# Allegro board METO_STM_CRY_V0_30.brd
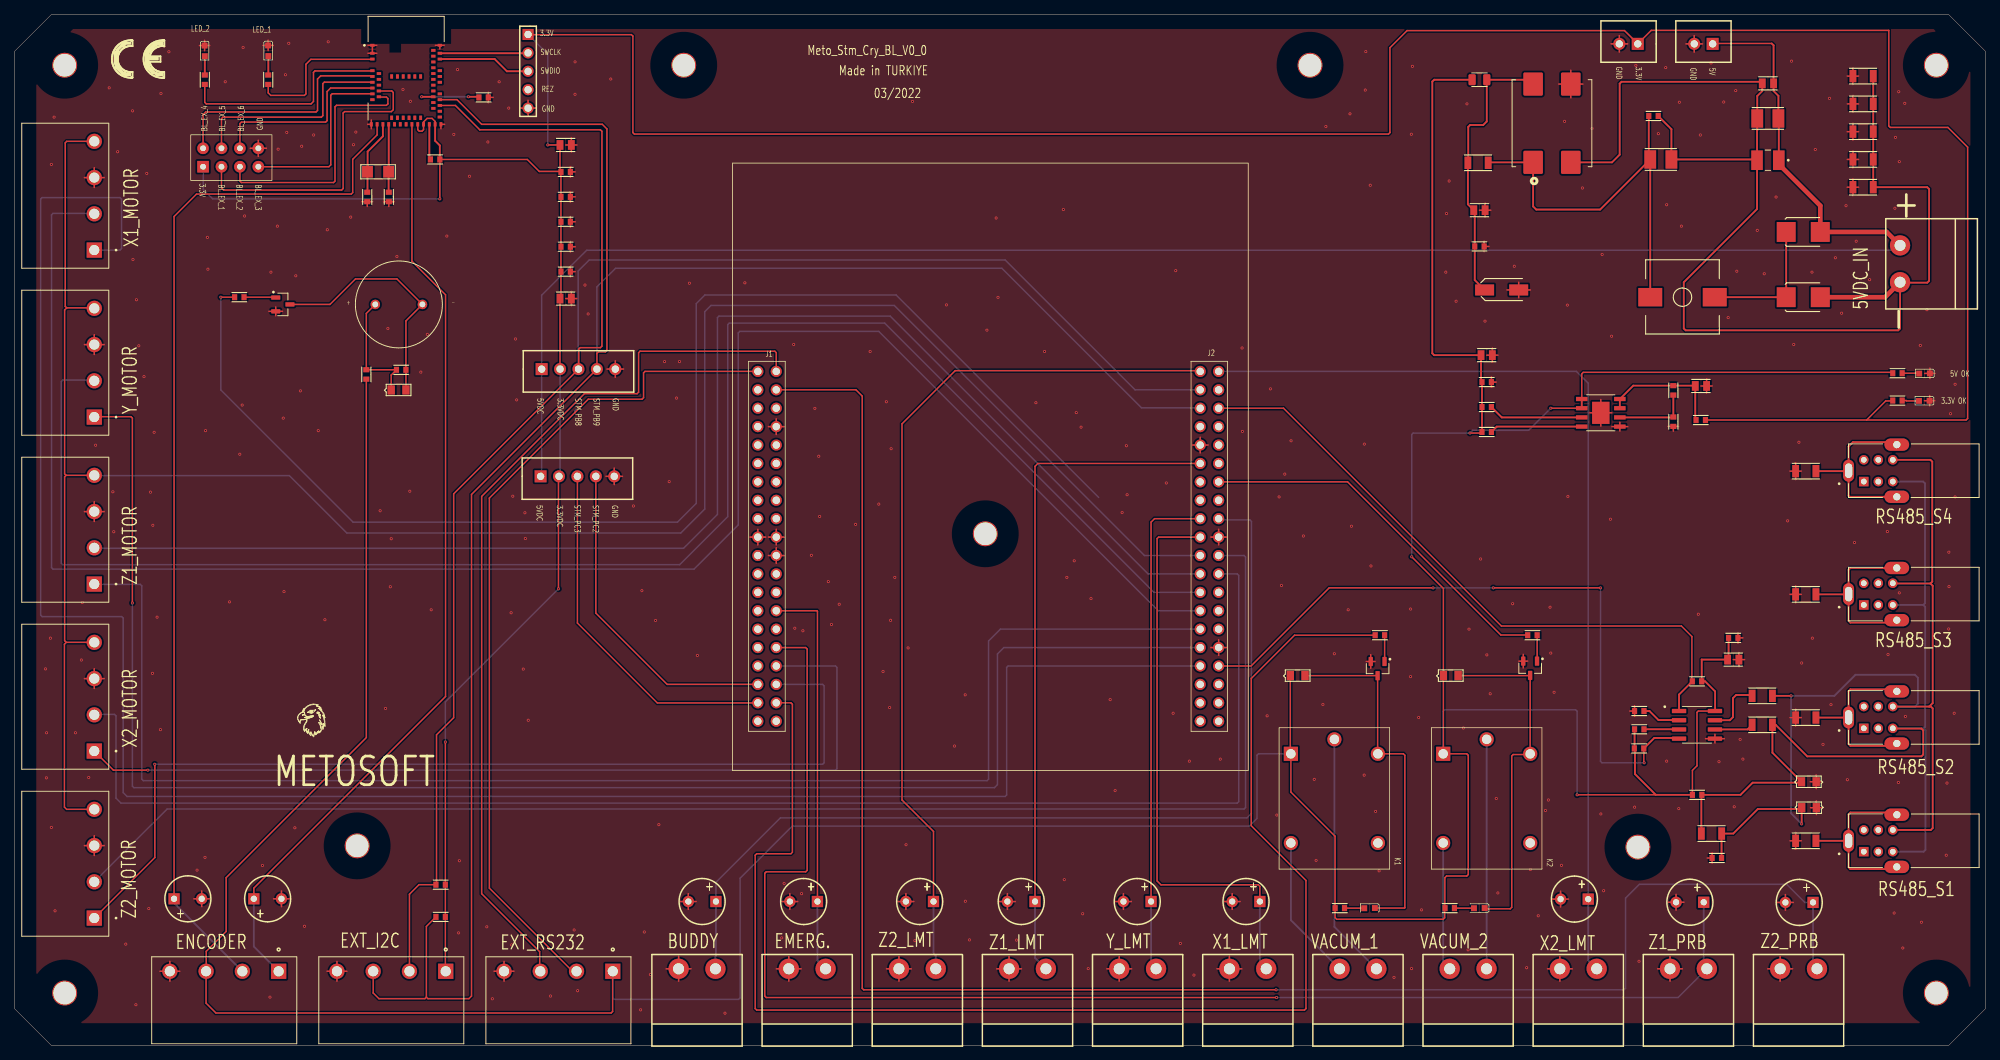
[diagram p0: board, top side]
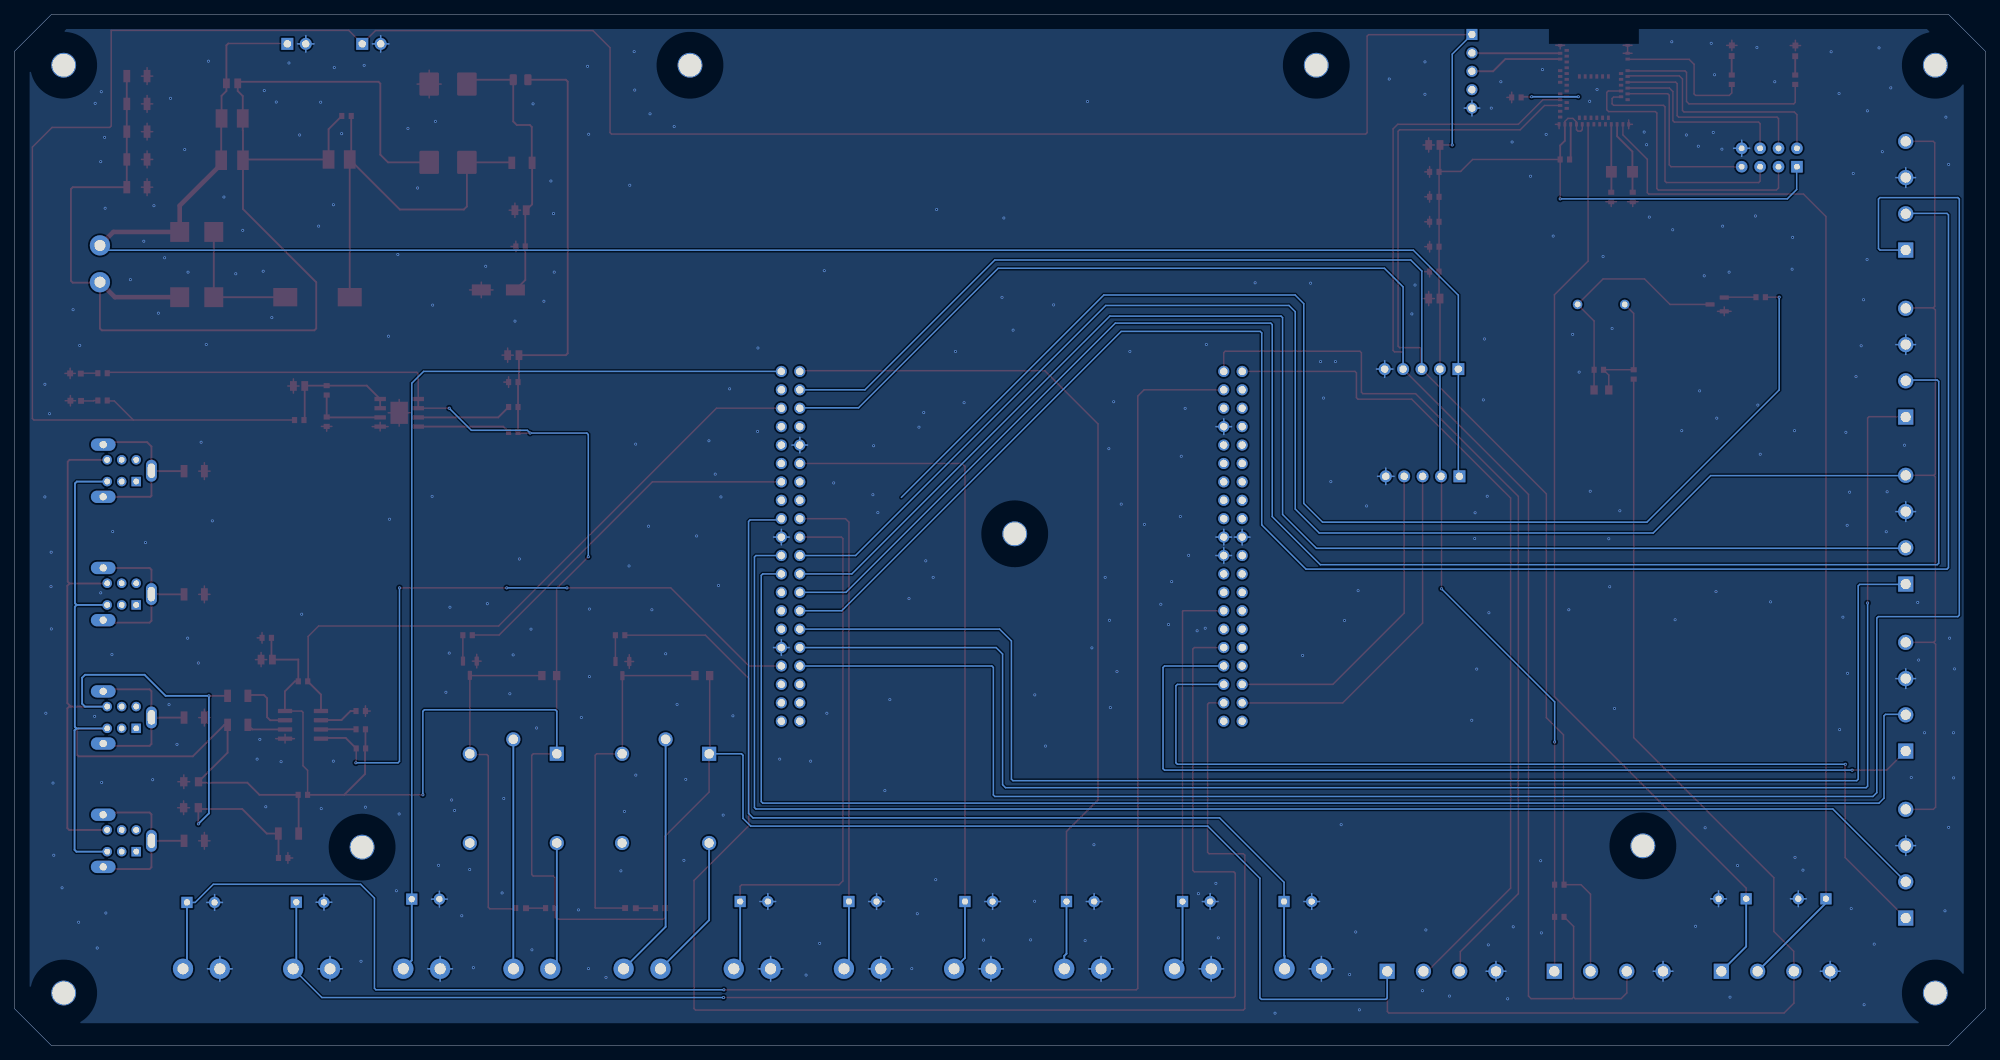
[diagram p1: board, bottom side, seen from below]

Outline 271.78 x 142.24 mm; copper layers: TOP, BOTTOM. Coordinates in mm from the lower left corner of the outline.
Outline path: 0,137.16 0,5.08 5.08,0 266.7,0 271.78,5.08 271.78,137.16 266.7,142.24 5.08,142.24 0,137.16

## Design rules (mm)
constraint set DEFAULT: min track width 0.203

## Placement (name value [footprint] x y rotation side)
C1  CAP POL  [CAPPOL2D250LS150034]  171.72 19.87 180 top
C2  CAP POL  [CAPPOL2D250LS150034]  217 20.2 180 top
C3  CAP POL  [CAPPOL2D250LS150034]  156.72 19.87 180 top
C4  CAP POL  [CAPPOL2D250LS150034]  140.72 19.87 180 top
C5  CAP POL  [CAPPOL2D250LS150034]  126.72 19.87 180 top
C6  CAP POL  [CAPPOL2D250LS150034]  110.72 19.87 180 top
C7  CAP POL  [CAPPOL2D250LS150034]  33 20.24 0 top
C8  CAP POL  [CAPPOL2D250LS150034]  96.72 19.87 180 top
C9  CAP POL  [CAPPOL2D250LS150034]  22 20.24 0 top
C10  CAP POL  [CAPPOL2D250LS150034]  232.92 19.76 180 top
C11  CAP POL  [CAPPOL2D250LS150034]  248 19.74 180 top
C12  10u/6V3/CER  [SMC0805]  237 53.24 0 top
C13  100n  [SMC0603]  237 56.24 0 top
C14  10u/6V3/CER  [SMC0805]  76 124.24 0 top
C15  100n  [SMC0603]  76 120.53 0 top
C16  100n  [SMC0603]  76 117.08 0 top
C17  100n  [SMC0603]  76 113.64 0 top
C18  100n  [SMC0603]  76 110.2 0 top
C19  100n  [SMC0603]  76 106.76 0 top
C20  10u/6V3/CER  [SMC0805]  76 103.05 0 top
C21  100n  [SMC0603]  64.68 130.8 0 top
C22  18p  [SMC0603]  48.64 117.07 90 top
C23  18p  [SMC0603]  51.61 117.07 90 top
C24  100n  [SMC0603]  202 110.24 0 top
C25  22uF/25V/LowESL  [SMC1210]  227 122.24 0 top
C26  100n  [SMC0603]  226 128.24 0 top
C27  10u/6V3/CER  [SMC0805]  202 115.24 0 top
C28  10u/6V3/CER  [SMC0805]  203 95.24 0 top
C29  100n  [SMC0603]  203 91.53 0 top
C30  10u/6V3/CER  [SMC0805]  232.54 90.99 0 top
C31  22uF/25VDV/Tantal  [CAP_6TPB33M]  241.78 122.14 180 top
C32  22uF/25V/LowESL  [SMC1210]  241.78 127.9 180 top
C33  10u/25V/CER  [SMC0805]  241.78 132.74 180 top
D1  1N4148WX  [SMDSOD323SD05T]  177.95 51.03 0 top
D2  1N4148WX  [SMDSOD323SD05T]  199.06 51.03 0 top
D3  SD12C  [SMDSOD323PESD5V]  248.44 36.39 0 top
D4  SD12C  [SMDSOD323PESD5V]  246.43 32.81 180 top
D5  1N4148WX  [SMDSOD323SD05T]  53.98 90.44 0 top
D6  LED-BLUE  [LED_0603]  35 137.24 90 top
D7  LED-RED  [LED_0603]  26.24 137.23 90 top
D8  MBRA340T3  [SMDO214AA21]  249 112.24 0 top
D9  MBRA340T3  [SMDO214AA21]  249 103.24 0 top
D10  SMAJ7A  [SMDO214AA21SMAJ33A]  205 104.24 0 top
D11  LED-GREEN  [LED_0603]  263.34 88.93 0 top
D12  LED-BLUE  [LED_0603]  186.85 18.94 0 top
D13  LED-BLUE  [LED_0603]  201.99 18.94 0 top
D14  LED-GREEN  [LED_0603]  263.37 92.7 0 top
F1  0ZCK0100FF2E  [FUSC2113X180N]  202 133.24 180 top
FB1  MPZ1608S601A  [SMR0603]  232.52 86.29 0 top
FL1  ACM1211-102-2PL-TL01  [FIL_ACM1211-102-2PL-TL01]  212 127.24 90 top
J1  FH_2x20SG  [FH2X20SG]  102.5 93 270 top
J2  FH_2x20SG  [FH2X20SG]  163.5 93 270 top
J3  CON2  [2LI_KLEMENS_200MILS]  155.46 10.58 180 top
J4  CON2  [2LI_KLEMENS_200MILS]  170.64 10.58 180 top
J5  282811-4  [TE_282811-4]  11 117.24 90 top
J6  CON2  [2LI_KLEMENS_200MILS]  185.83 10.58 180 top
J7  CON2  [2LI_KLEMENS_200MILS]  201.02 10.58 180 top
J8  282811-4  [TE_282811-4]  11 94.2 90 top
J9  CON2  [2LI_KLEMENS_200MILS]  140.27 10.58 180 top
J10  282811-4  [TE_282811-4]  11 71.16 90 top
J11  282811-4  [TE_282811-4]  51.96 10.24 180 top
J12  CON2  [2LI_KLEMENS_200MILS]  125.08 10.58 180 top
J13  282811-4  [TE_282811-4]  11 48.12 90 top
J14  282811-4  [TE_282811-4]  75 10.24 180 top
J15  CON2  [2LI_KLEMENS_200MILS]  109.89 10.58 180 top
J16  282811-4  [TE_282811-4]  11 25.08 90 top
J17  CON2  [2LI_KLEMENS_200MILS]  94.7 10.58 180 top
J18  CON2  [2LI_KLEMENS_200MILS]  79.51 10.58 180 top
J19  CON2  [2LI_KLEMENS_200MILS]  260 93.24 270 top
J20  282811-4  [TE_282811-4]  28.92 10.24 180 top
J21  CON2  [2LI_KLEMENS_200MILS]  216.21 10.58 180 top
J22  CON2  [2LI_KLEMENS_200MILS]  231.4 10.58 180 top
J23  5787956-1  [TE_5787956-1]  257 79.3 0 top
J24  CON5  [CON5X140PROG]  70.82 139.49 270 top
J25  5787956-1  [TE_5787956-1]  257 62.28 0 top
J26  5787956-1  [TE_5787956-1]  257 45.26 0 top
J27  5787956-1  [TE_5787956-1]  257 28.24 0 top
J28  CON8  [HEADER_2_54MM_2X4]  26 121.24 0 top
J29  CON5  [CON5X140]  72.69 93.32 0 top
J30  CON5  [CON5X140]  72.54 78.52 0 top
J31  CON2  [CON2X140]  234.16 138.19 180 top
J32  CON2  [CON2X140]  223.83 138.19 180 top
K1  JQC-3F-_T73_-1Z-12VDC  [JQC3FT731Z12VDC]  176 40.24 270 top
K2  JQC-3F-_T73_-1Z-12VDC  [JQC3FT731Z12VDC]  197 40.24 270 top
L1  10uH  [SML0603]  58 122.24 0 top
L2  10u/SLF10145  [SLF10145NEW]  230 103.24 0 top
LS1  CCG-1206  [CUI_CCG-1206]  53 102.24 0 top
NOREF  -  []  188 40.24 90 top
NOREF#2  -  []  176 40.24 0 top
NOREF#3  -  []  176 27.94 0 top
NOREF#4  -  [unnamed#2]  6.92 135.24 0 top
NOREF#5  -  []  176 40.24 90 top
NOREF#6  -  []  197 40.24 0 top
NOREF#7  -  [unnamed#2]  178.64 135.24 0 top
NOREF#8  -  []  39.01 42.58 0 top
NOREF#9  -  [unnamed#2]  92.28 135.24 0 top
NOREF#10  -  []  209 40.24 90 top
NOREF#11  -  [unnamed#2]  47.25 27.54 0 top
NOREF#12  -  [unnamed#2]  223.85 27.37 0 top
NOREF#13  -  []  209 27.94 90 top
NOREF#14  -  [unnamed#2]  133.86 70.6 0 top
NOREF#15  -  []  197 27.94 0 top
NOREF#16  -  []  197 40.24 90 top
NOREF#17  -  [unnamed#2]  265 135.24 0 top
NOREF#18  -  [unnamed#2]  6.92 7.24 0 top
NOREF#19  -  []  188 27.94 90 top
NOREF#20  -  [unnamed#2]  265 7.24 0 top
NOREF#21  -  []  102.5 44.74 0 top
Q1  BC817  [SOT95P230X110-3N]  187.96 52 270 top
Q2  BC817  [SOT95P230X110-3N]  208.99 52.05 270 top
Q3  BC817  [SOT95P230X110-3N]  37 102.24 0 top
R1  1K  [SMR0603]  188.28 56.61 0 top
R2  1K  [SMR0603]  209.31 56.61 0 top
R3  10k  [SMR0603]  232.02 34.58 0 top
R4  10k  [SMR0603]  224.01 40.98 0 top
R5  10k  [SMR0603]  224.04 43.63 0 top
R6  10k  [SMR0603]  232 50.24 180 top
R7  10k  [SMR0603]  224.04 46.14 0 top
R8  100R  [SMR1206]  241 44.24 180 top
R9  120R  [SMR1206]  234 29.24 0 top
R10  100R  [SMR1206]  241 48.24 180 top
R11  100R  [SMR1206]  247 79.24 0 top
R12  10k  [SMR0603]  234.73 25.87 180 top
R13  33R  [SMR0603]  48.51 92.58 270 top
R14  1K  [SMR0603]  53.32 93.22 180 top
R15  180R  [SMR0603]  31 103.24 0 top
R16  470R  [SMR0603]  34.99 133.24 90 top
R17  470R  [SMR0603]  26.24 133.24 90 top
R18  OR  [SMR1206]  201.81 121.78 180 top
R19  0R  [SMR1206]  254.9 118.41 180 top
R20  0R  [SMR1206]  254.9 122.24 180 top
R21  0R  [SMR1206]  254.9 126.08 180 top
R22  0R  [SMR1206]  254.9 129.91 180 top
R23  0R  [SMR1206]  254.9 133.74 180 top
R24  100k  [SMR0603]  203 88.08 0 top
R25  6k8  [SMR0603]  228.74 90.39 270 top
R26  100k  [SMR0603]  203 84.64 0 top
R27  470R  [SMR0603]  259.64 88.98 0 top
R28  2k2  [SMR0603]  228.74 86.06 270 top
R29  100R  [SMR1206]  247 62.24 0 top
R30  100R  [SMR1206]  247 45.24 0 top
R31  100R  [SMR1206]  247 28.24 0 top
R32  470R  [SMR0603]  182.75 18.95 0 top
R33  470R  [SMR0603]  197.9 18.95 0 top
R34  1K5  [SMR0603]  58.76 17.74 180 top
R35  1K5  [SMR0603]  58.76 22.19 180 top
R36  470R  [SMR0603]  259.64 92.75 0 top
U1  MAX485ESA+  [SOIC127P600X175-8N]  232 44.24 0 top
U2  MDBT50Q-1MV2  [XCVR_MDBT50Q-1MV2]  54 134.24 0 top
U3  AP7165-SPG-13  [SOIC127P600X163-9N]  218.74 87.29 0 top
UNK&COMP  -  []  12.78 130.7 0 top
Y1  CM315D32768DZFT  [XTAL_CM315_SMD]  50.13 120.54 180 top

## Library data of the parts
C1-C11 = CAP POL
C12-C23 C28-C30 = CAPACITOR NON-POL
C24-C27 = CAPACITOR NON-POL: room: Vdd5V
C31 = 6TPB33M: room: PowerIn
C32 C33 = CAPACITOR NON-POL: room: PowerIn
D1 D2 D5 = DIODE ZENER: room: Buzzer
D3 D4 = DIODE TVS BI-DIR: room: rs232
D6 D7 D11-D14 = LED
D8 = 1N5819M/CYL
D9 = 1N5819M/CYL: room: Vdd5V
D10 = DIODE TVS: room: Vdd5V
F1 = 0ZCK0100FF2E: room: usb2
FB1 = INDUCTOR/SM
FL1 = ACM1211-102-2PL-TL01: room: Vdd5V
J1 J2 = FH_2x20SG
J3 J4 J6 J7 J9 J12 J15 J17-J19 J21 J22 J31 J32 = CON2
J5 J8 J10 J11 J13 J14 J16 J20 = 282811-4
J23 J25-J27 = 5787956-1
J24 J29 J30 = CON5
J28 = CON8
K1 K2 = JQC-3F-_T73_2
L1 = INDUCTOR
L2 = INDUCTOR/SM: room: Vdd5V
LS1 = CCG-1206: room: Buzzer
Q1-Q3 = BC817: room: Buzzer
R1 R2 R11 R13-R15 R29-R31 = RESISTOR/SM_0: room: Buzzer
R3-R10 R12 R25 R28 = RESISTOR/SM_0
R16 R17 R24 R26 R27 R32-R36 = RESISTOR
R18 = RESISTOR/SM_0: room: Vdd5V
R19-R23 = RESISTOR: room: GndMatch
U1 = MAX485ESA+
U2 = MDBT50Q-1MV2_0
U3 = AP7165-SPG-13_0
Y1 = CRYSTAL/SM

## Footprints (pads in the part's own frame, mm; a bottom-side part is the same pattern mirrored in y, then rotated)
2LI_KLEMENS_200MILS
  round 2.794 hole 1.524: 1(-17.145,0) 2(-12.065,0)
CAP_6TPB33M
  rect 1.6x2.7 smd: 1(-1.5,0) 2(1.5,0)
CAPPOL2D250LS150034
  rect 1.549x1.549 hole 0.864: 1(0,0)
  round 1.549 hole 0.864: 2(3.81,0)
CON2X140
  rect 1.651x1.651 hole 1.016: 1(0,0)
  round 1.651 hole 1.016: 2(2.54,0)
CON5X140
  rect 1.651x1.651 hole 1.016: 1(0,0)
  round 1.651 hole 1.016: 2(2.54,0) 3(5.08,0) 4(7.62,0) 5(10.16,0)
CON5X140PROG
  rect 1.524x1.524 hole 1.016: 1(0,0)
  round 1.524 hole 1.016: 2(2.54,0) 3(5.08,0) 4(7.62,0) 5(10.16,0)
CUI_CCG-1206
  round 1.308 hole 0.8: M(3.25,0) P(-3.25,0)
FH2X20SG
  round 1.53 hole 1.02: 1(0,0) 2(0,2.54) 3(2.54,0) 4(2.54,2.54) 5(5.08,0) 6(5.08,2.54) 7(7.62,0) 8(7.62,2.54) 9(10.16,0) 10(10.16,2.54) 11(12.7,0) 12(12.7,2.54) 13(15.24,0) 14(15.24,2.54) 15(17.78,0) 16(17.78,2.54) 17(20.32,0) 18(20.32,2.54) 19(22.86,0) 20(22.86,2.54) 21(25.4,0) 22(25.4,2.54) 23(27.94,0) 24(27.94,2.54) 25(30.48,0) 26(30.48,2.54) 27(33.02,0) 28(33.02,2.54) 29(35.56,0) 30(35.56,2.54) 31(38.1,0) 32(38.1,2.54) 33(40.64,0) 34(40.64,2.54) 35(43.18,0) 36(43.18,2.54) 37(45.72,0) 38(45.72,2.54) 39(48.26,0) 40(48.26,2.54)
FIL_ACM1211-102-2PL-TL01
  custom 3.2x2.7 smd: 1(-5.4,2.6) 2(-5.4,-2.6) 3(5.4,-2.6) 4(5.4,2.6)
FUSC2113X180N
  custom 1x1.52 smd: 1(-1.01,0) 2(1.01,0)
HEADER_2_54MM_2X4
  rect 1.6x1.6 hole 0.8: 1(0,0)
  round 1.6 hole 0.8: 2(2.54,0) 3(5.08,0) 4(7.62,0) 5(0,2.54) 6(2.54,2.54) 7(5.08,2.54) 8(7.62,2.54)
JQC3FT731Z12VDC
  rect 1.95x1.95 hole 1.3: 1(0,0)
  round 1.95 hole 1.3: 2(12.3,0) 3(12.3,12) 4(0,12) 5(-2,6)
LED_0603
  rect 0.813x0.813 smd: 1(-0.737,0) 2(0.737,0.025)
SLF10145NEW
  rect 3.302x2.54 smd: 1(-4.445,0) 2(4.445,0)
SMC0603
  rect 0.711x0.838 smd: 1(-0.65,0) 2(0.65,0)
SMC0805
  rect 0.94x1.346 smd: 1(-0.78,0) 2(0.78,0)
SMC1210
  rect 1.626x2.54 smd: 1(-1.448,0) 2(1.473,0)
SMDO214AA21
  rect 2.616x2.743 smd: 1(0,0) 2(-4.699,0)
SMDO214AA21SMAJ33A
  rect 2.616x1.524 smd: 1(2.413,0) 2(-2.286,0)
SMDSOD323PESD5V
  rect 1.016x1.27 smd: 1(0,0) 2(-2.032,0)
SMDSOD323SD05T
  rect 1.016x1.27 smd: 1(0,0) 2(-2.032,0)
SML0603
  rect 0.711x0.838 smd: 1(-0.65,0) 2(0.65,0)
SMR0603
  rect 0.711x0.838 smd: 1(-0.65,0) 2(0.65,0)
SMR1206
  rect 0.94x1.702 smd: 1(-1.4,0) 2(1.4,0)
SOIC127P600X163-9N
  rect 1.58x0.59 smd: 1(-2.625,1.905) 2(-2.625,0.635) 3(-2.625,-0.635) 4(-2.625,-1.905) 5(2.625,-1.905) 6(2.625,-0.635) 7(2.625,0.635) 8(2.625,1.905)
  rect 2.41x3.05 smd: 9(0,0)
SOIC127P600X175-8N
  custom 1.97x0.59 smd: 1(-2.475,1.905) 2(-2.475,0.635) 3(-2.475,-0.635) 4(-2.475,-1.905) 5(2.475,-1.905) 6(2.475,-0.635) 7(2.475,0.635) 8(2.475,1.905)
SOT95P230X110-3N
  custom 1.26x0.59 smd: 1(-0.98,0.95) 2(-0.98,-0.95) 3(0.98,0)
TE_282811-4
  rect 2.1x2.1 hole 1.4: 1(-7.5,0)
  round 2.1 hole 1.4: 2(-2.5,0) 3(2.5,0) 4(7.5,0)
TE_5787956-1
  rect 1.308x1.308 hole 0.8: 1(-2,-1.5)
  round 1.308 hole 0.8: 2(-2,1.5) 3(0,-1.5) 4(0,1.5) 5(2,-1.5) 6(2,1.5)
  oval 1.508x3.016 hole 1x2: S1(-4.1,0)
  oval 3.4x1.7 hole 1: S2(2.55,3.6) S3(2.55,-3.6)
unnamed#2
  round 3.429 hole 3.124: (0,0)
XCVR_MDBT50Q-1MV2
  rect 0.6x0.4 smd: 1(-4.65,3.75) 2(-4.65,2.65) 3(-4.65,1.85) 4(-4.65,0.25) 5(-3.75,-0.15) 6(-4.65,-0.55) 7(-3.75,-0.95) 8(-4.65,-1.35) 9(-3.75,-1.75) 10(-4.65,-2.15) 11(-3.75,-2.55) 12(-4.65,-2.95) 13(-3.75,-3.35) 14(-4.65,-3.75) 34(4.65,-6.15) 35(4.65,-5.35) 36(3.75,-4.95) 37(4.65,-4.55) 38(3.75,-4.15) 39(4.65,-3.75) 40(3.75,-3.35) 41(4.65,-2.95) 42(3.75,-2.55) 43(3.75,-1.75) 44(4.65,-1.35) 45(3.75,-0.95) 46(4.65,-0.55) 47(3.75,-0.15) 48(4.65,0.25) 49(3.75,0.65) 50(3.75,1.45) 51(4.65,1.85) 52(3.75,2.25) 53(4.65,2.65) 54(3.75,3.05) 55(4.65,3.75)
  rect 0.4x0.6 smd: 15(-4.8,-7.15) 16(-4,-7.15) 17(-3.2,-7.15) 18(-2.4,-7.15) 19(-2,-6.25) 20(-1.6,-7.15) 21(-1.2,-6.25) 22(-0.8,-7.15) 23(-0.4,-6.25) 24(0,-7.15) 25(0.4,-6.25) 26(0.8,-7.15) 27(1.2,-6.25) 28(1.6,-7.15) 29(2,-6.25) 30(2.4,-7.15) 31(3.2,-7.15) 32(4,-7.15) 33(4.8,-7.15) 56(-2,-0.55) 57(-1.2,-0.55) 58(-0.4,-0.55) 59(0.4,-0.55) 60(1.2,-0.55) 61(2,-0.55)
XTAL_CM315_SMD
  rect 1.499x1.6 smd: 1(-1.453,0) 2(1.463,0)

## Nets
3.3V: C14.1 C15.1 C16.1 C17.1 C18.1 C19.1 C20.1 FB1.2 J11.1 J24.1 J28.1 J29.2 J30.2 J32.1 L1.2 R27.1 R34.1 R35.1 U2.28 U2.30(VDDH) U2.32
GND: C1.2 C2.2 C3.2 C4.2 C5.2 C6.2 C7.2 C8.2 C9.2 C10.2 C11.2 C12.2 C13.2 C14.2 C15.2 C16.2 C17.2 C18.2 C19.2 C20.2 C21.2 C22.1 C23.1 C24.2 C27.2 C28.2 C29.2 C30.2 D3.1 D4.2 D6.2(CATHODE) D7.2(CATHODE) D10.1 D11.2(CATHODE) D14.2(CATHODE) FL1.3 J1.8 J1.19 J1.20 J1.22 J2.9 J2.20 J2.32 J3.2 J5.3 J7.2 J8.3 J9.2 J10.3 J11.4 J12.2 J13.3 J14.4 J15.2 J16.3 J17.2 J18.2 J20.4 J21.2 J22.2 J24.5 J28.8 J29.5 J30.5 J31.2 J32.2 Q1.2(E) Q2.2(E) Q3.2(E) R7.1 R11.1 R12.2 R19.2 R20.2 R21.2 R22.2 R23.2 R28.2 R29.1 R30.1 R31.1 U1.5 U2.1 U2.2 U2.15 U2.33 U2.55 U3.5 U3.9
VDD5VIN: C12.1 C13.1 C28.1 C29.1 D1.2(CATHODE) D2.2(CATHODE) F1.2 J14.1 J20.3 K1.1 K2.1 R3.1 R4.1 R5.1 R6.1 R13.2 R24.1 R26.1 R32.1 R33.1 R36.1 U1.8(VCC) U3.1 U3.2
485_A: D3.2 J23.5 J25.5 J26.5 J27.5 R3.2 R8.1 R9.1
485_B: D4.1 J23.6 J25.6 J26.6 J27.6 R9.2 R10.1 R12.1
BL_EX_PIN_1: J28.2 U2.11
BL_EX_PIN_2: J28.3 U2.13
BL_EX_PIN_3: J28.4 U2.12
BL_EX_PIN_4: J28.5 U2.6
BL_EX_PIN_5: J28.6 U2.8
BL_EX_PIN_6: J28.7 U2.10
CON_A_PIN_1: J1.1 J14.2
CON_A_PIN_2: J1.2 J14.3
CON_A_PIN_3: J1.3
CON_A_PIN_4: C11.1 J1.4 J22.1
CON_A_PIN_5: J1.5
CON_A_PIN_6: J1.6
CON_A_PIN_7: J1.7
CON_A_PIN_9: J1.9
CON_A_PIN_10: J1.10
CON_A_PIN_11: J1.11
CON_A_PIN_12: J1.12
CON_A_PIN_13: J1.13
CON_A_PIN_14: J1.14
CON_A_PIN_15: J1.15
CON_A_PIN_16: J1.16
CON_A_PIN_17: J1.17
CON_A_PIN_18: J1.18
CON_A_PIN_21: J1.21
CON_A_PIN_23: J1.23
CON_A_PIN_24: J1.24
CON_A_PIN_25: J1.25
CON_A_PIN_26: J1.26
CON_A_PIN_27: J1.27
CON_A_PIN_28: C6.1 J1.28 J17.1
CON_A_PIN_29: J1.29
CON_A_PIN_30: J1.30
CON_A_PIN_31: J1.31
CON_A_PIN_32: C10.1 J1.32 J21.1
CON_A_PIN_33: J1.33
CON_A_PIN_34: J1.34 J13.1
CON_A_PIN_35: J1.35 J30.4
CON_A_PIN_36: J1.36 J16.1
CON_A_PIN_37: J1.37 J30.3
CON_A_PIN_38: J1.38 R1.1
CON_A_PIN_39: J1.39
CON_A_PIN_40: J1.40
CON_B_PIN_1: C5.1 J2.1 J15.1
CON_B_PIN_2: C2.1 J2.2 J7.1
CON_B_PIN_3: J2.3 J11.2 J29.3 R35.2 U2.37
CON_B_PIN_4: J2.4
CON_B_PIN_5: J2.5 J11.3 J29.4 R34.2 U2.39
CON_B_PIN_6: J2.6 R6.2 U1.1
CON_B_PIN_7: J2.7
CON_B_PIN_8: J2.8
CON_B_PIN_10: J2.10
CON_B_PIN_11: C4.1 J2.11 J12.1
CON_B_PIN_12: J2.12 R15.1
CON_B_PIN_13: J2.13
CON_B_PIN_14: J2.14 R2.1
CON_B_PIN_15: J2.15
CON_B_PIN_16: J2.16
CON_B_PIN_17: C3.1 J2.17 J9.1
CON_B_PIN_18: C8.1 J2.18 J18.1
CON_B_PIN_19: C1.1 J2.19 J3.1
CON_B_PIN_21: J2.21 J5.4 J8.4 J10.4 J13.4 J16.4
CON_B_PIN_22: J2.22 J16.2
CON_B_PIN_23: J2.23 J10.2
CON_B_PIN_24: J2.24 J13.2
CON_B_PIN_25: J2.25 J8.2
CON_B_PIN_26: J2.26
CON_B_PIN_27: J2.27 J5.2
CON_B_PIN_28: J2.28
CON_B_PIN_29: J2.29 J10.1
CON_B_PIN_30: J2.30
CON_B_PIN_31: J2.31 J8.1
CON_B_PIN_33: J2.33 J5.1
CON_B_PIN_34: J2.34 R4.2 U1.4
CON_B_PIN_35: J2.35
CON_B_PIN_36: J2.36
CON_B_PIN_37: J2.37
CON_B_PIN_38: J2.38
CON_B_PIN_39: J2.39
CON_B_PIN_40: J2.40
DBG_LED_1: R16.1 U2.3
DBG_LED_2: R17.1 U2.4
ENCODER_A: C7.1 J20.1 U2.26
ENCODER_B: C9.1 J20.2 U2.16
FGND: C25.2 C26.2 C31.2 C32.2 C33.2 D9.1 FL1.2 J19.2 R19.1 R20.1 R21.1 R22.1 R23.1
NRESET: C21.1 U2.40
RELAY1_1: J4.1 K1.5
RELAY1_2: J4.2 K1.2
RELAY2_1: J6.1 K2.5
RELAY2_2: J6.2 K2.2
SWCLK: J24.2 U2.53
SWDIO: J24.3 U2.51
UC_OSC_IN: C22.2 U2.17 Y1.2
UC_OSC_OUT: C23.2 U2.18 Y1.1
VDC_5V: C31.1 C32.1 C33.1 D8.1 J19.1 J29.1 J30.1 J31.1
N8883662: D5.1 LS1.M Q3.3 R14.1
N8883700: D5.2(CATHODE) LS1.P R13.1 R14.2
N9062725: L1.1 U2.31
N9076286: D8.2(CATHODE) D9.2(CATHODE) L2.2
N9076290: C25.1 C26.1 FL1.1 L2.1 R18.1
N9076304: C24.1 C27.1 D10.2(CATHODE) F1.1 FL1.4 R18.2
N9079599: C30.1 FB1.1 R25.1 U3.7 U3.8
N9079749: R24.2 U3.3(POK)
N9079753: R25.2 R28.1 U3.6
N9079813: R26.2 U3.4
N9092651: D1.1 D12.2(CATHODE) K1.4 Q1.3
N9092718: Q1.1 R1.2
N9093131: D2.1 D13.2(CATHODE) K2.4 Q2.3
N9093215: Q2.1 R2.2
N9096482: R7.2 U1.2
N9096486: R5.2 U1.3
N9096991: R8.2 U1.6
N9096995: R10.2 U1.7
N9098499: J23.S1 J23.S2 J23.S3(SHIELD__2) R11.2
N9104799: J25.S1 J25.S2 J25.S3(SHIELD__2) R29.2
N9105165: J26.S1 J26.S2 J26.S3(SHIELD__2) R30.2
N9105269: J27.S1 J27.S2 J27.S3(SHIELD__2) R31.2
N9107937: D12.1 R32.2
N9108044: D13.1 R33.2
N90510690: Q3.1 R15.2
N90714391: D6.1 R16.2
N90750741: D7.1 R17.2
N90797911: D11.1 R27.2
N91389651: D14.1 R36.2

Pads without a net: J23 1 2 3 4; J24 4; J25 1 2 3 4; J26 1 2 3 4; J27 1 2 3 4; K1 3; K2 3; U2 5 7 9 14 19 20 21 22 23 24 25 27 29 34 35 36 38 41 42 43 44 45 46 47 48 49 50 52 54 56 57 58 59 60 61

## Via types
v1: diameter 0.406, hole 0.203, TOP to BOTTOM, 340 vias

## Routing (per net, layer and track width the routed paths; a pad name or vN(x,y) marks a point on that pad's centre or on a via; arc(x,y) is an arc through that point)
3.3V: length 527.2
  TOP w0.203: 255.39,86.3 269.11,86.3 269.32,86.5 269.32,123.94 266.6,126.66 258.65,126.66 258.44,126.86 258.44,140.04 225.69,140.04 J32.1 222,140.02 192.02,140.02 189.66,137.66 189.66,125.95 189.46,125.74 85.47,125.74 85.27,125.95 85.27,139.26 85.06,139.46 70.84,139.46 J24.1 ; 255.39,86.3 233.18,86.3 FB1.2 233.23,86.22 ; 255.39,86.3 258.02,88.93 258.94,88.93 R27.1 ; J30.2 75.01,78.45 v1(75.01,63.01) ; 75.29,120.59 72.36,120.59 70.71,122.24 L1.2 v1(58.65,116.8) ; 75.29,120.59 75.22,120.66 C14.1 v1(73.53,124.24) ; 75.29,120.59 C15.1 C16.1 C17.1 C18.1 C19.1 75.35,103.18 C20.1 75.22,93.33 J29.2 ; v1(59.41,41.87) R35.1 R34.1 59.41,10.29 J11.1 ; U2.28 55.6,126.35 55.8,126.15 56.2,126.15 56.4,126.35 U2.30 56.4,127.41 56.9,127.9 57.58,127.9 58,127.49 U2.32
  TOP w0.254: L1.2 58.65,124.17 58,124.82 U2.32
  BOTTOM w0.203: J24.1 73.53,136.77 v1(73.53,124.24) ; J28.1 26.04,121.2 26.04,118.1 27.33,116.8 v1(58.65,116.8) ; J30.2 75.23,78.67 J29.2 ; v1(75.01,63.01) 59.41,47.41 v1(59.41,41.87)
GND: length 564.9
  TOP w0.203: 51.61,115.76 C23.1 ; C23.1 52.34,116.42 ; C23.1 50.89,116.42 ; C1.2 167.91,20.95 ; C1.2 167.91,18.79 ; C1.2 166.83,19.87 ; C1.2 168.99,19.87 ; C12.2 238.55,53.24 ; C12.2 237,53.24 ; C12.2 237.78,54.22 ; C12.2 237.78,52.26 ; 166.04,69.07 J2.20 ; J2.20 164.97,70.14 ; J2.20 167.11,70.14 ; J2.20 166.04,71.21 ; 58.8,126.49 U2.33 59.3,127.09 ; U3.5 222.46,85.38 ; U3.5 220.27,85.38 ; U3.5 221.36,85.98 ; U3.5 221.36,84.78 ; 34.26,137.98 D6.2 ; D6.2 34.97,138.69 ; D6.2 34.97,137.27 ; D6.2 35.69,137.98 ; 163.5,81.77 J2.9 ; J2.9 163.5,83.91 ; J2.9 162.43,82.84 ; J2.9 164.57,82.84 ; 11,72.31 J10.3 ; J10.3 9.65,73.66 ; J10.3 12.35,73.66 ; J10.3 11,75.01 ; R23.2 254.27,133.74 ; R23.2 253.5,132.58 ; R23.2 252.72,133.74 ; R23.2 253.5,134.9 ; 253.5,117.26 R19.2 ; R19.2 252.72,118.41 ; R19.2 254.27,118.41 ; R19.2 253.5,119.57 ; 11,95.35 J8.3 ; J8.3 11,98.05 ; J8.3 9.65,96.7 ; J8.3 12.35,96.7 ; 120.25,10.58 J15.2 ; J15.2 121.95,12.29 ; J15.2 123.65,10.58 ; J15.2 121.95,8.88 ; 35.09,101.29 Q3.2 ; Q3.2 36.02,100.69 ; Q3.2 36.95,101.29 ; Q3.2 36.02,101.89 ; 203.65,90.8 C29.2 ; C29.2 204.31,91.53 ; C29.2 203.65,92.25 ; 82.7,77.39 J30.5 ; J30.5 82.7,79.65 ; J30.5 83.83,78.52 ; J30.5 81.57,78.52 ; C30.2 234.1,90.99 ; C30.2 233.32,91.97 ; C30.2 233.32,90.01 ; C30.2 232.55,90.99 ; D11.2 264.79,88.96 ; D11.2 263.36,88.96 ; D11.2 264.07,89.67 ; D11.2 264.07,88.24 ; J24.5 70.82,130.39 ; J24.5 70.82,128.26 ; J24.5 71.88,129.33 ; J24.5 69.75,129.33 ; 135.44,10.58 J12.2 ; J12.2 137.14,8.88 ; J12.2 137.14,12.29 ; J12.2 138.84,10.58 ; C21.2 65.99,130.8 ; C21.2 65.33,131.52 ; C21.2 65.33,130.08 ; R20.2 253.5,123.4 ; R20.2 254.27,122.24 ; R20.2 252.72,122.24 ; R20.2 253.5,121.09 ; 228.03,19.76 C10.2 ; C10.2 229.11,20.84 ; C10.2 229.11,18.68 ; C10.2 230.19,19.76 ; J1.19 102.5,71.21 ; J1.19 102.5,69.07 ; J1.19 103.57,70.14 ; J1.19 101.43,70.14 ; R12.2 234.08,26.6 ; R12.2 233.42,25.87 ; R12.2 234.08,25.15 ; C17.2 76.65,114.37 ; C17.2 77.31,113.64 ; C17.2 76.65,112.92 ; 248.44,35.45 D3.1 ; D3.1 247.62,36.39 ; D3.1 248.44,37.33 ; D3.1 249.25,36.39 ; 205.8,104.24 D10.1 ; D10.1 209.03,104.24 ; D10.1 207.41,103.17 ; D10.1 207.41,105.31 ; 203.78,94.26 C28.2 ; C28.2 203,95.24 ; C28.2 203.78,96.22 ; C28.2 204.55,95.24 ; 234.47,41.74 U1.5 ; U1.5 234.47,42.94 ; U1.5 235.76,42.34 ; U1.5 233.18,42.34 ; 222.73,46.14 R7.1 ; R7.1 223.39,46.86 ; R7.1 223.39,45.42 ; 245.6,44.08 R30.1 ; R30.1 245.6,46.4 ; R30.1 246.37,45.24 ; R30.1 244.82,45.24 ; 202.78,114.26 C27.2 ; C27.2 202,115.24 ; C27.2 203.55,115.24 ; C27.2 202.78,116.22 ; 105.04,84.31 J1.8 ; J1.8 106.11,85.38 ; J1.8 105.04,86.45 ; J1.8 103.97,85.38 ; 264.11,92.01 D14.2 ; D14.2 264.11,93.44 ; D14.2 264.82,92.72 ; D14.2 263.4,92.72 ; C20.2 76.78,104.03 ; C20.2 76.78,102.07 ; C20.2 77.55,103.05 ; C20.2 76.01,103.05 ; J2.32 167.11,54.9 ; J2.32 166.04,55.97 ; J2.32 164.97,54.9 ; J2.32 166.04,53.83 ; J9.2 152.33,12.29 ; J9.2 152.33,8.88 ; J9.2 150.63,10.58 ; J9.2 154.03,10.58 ; J14.4 67.5,11.6 ; J14.4 67.5,8.89 ; J14.4 68.85,10.24 ; J14.4 66.14,10.24 ; 228.74,84.75 R28.2 ; R28.2 229.46,85.41 ; R28.2 228.01,85.41 ; FL1.3 216.25,132.64 ; FL1.3 212.94,132.64 ; FL1.3 214.6,130.74 ; FL1.3 214.6,134.54 ; C5.2 122.91,20.95 ; C5.2 123.99,19.87 ; C5.2 122.91,18.79 ; C5.2 121.83,19.87 ; J1.20 105.04,71.21 ; J1.20 106.11,70.14 ; J1.20 105.04,69.07 ; J1.20 103.97,70.14 ; R11.1 245.6,80.4 ; R11.1 246.37,79.24 ; R11.1 245.6,78.08 ; R11.1 244.82,79.24 ; 33.62,122.68 J28.8 ; J28.8 34.72,123.78 ; J28.8 32.52,123.78 ; J28.8 33.62,124.88 ; Q1.2 187.01,53.91 ; Q1.2 186.41,52.98 ; Q1.2 187.01,52.04 ; Q1.2 187.61,52.98 ; 9.65,27.58 J16.3 ; J16.3 11,26.23 ; J16.3 11,28.93 ; J16.3 12.35,27.58 ; 91.83,19.87 C8.2 ; C8.2 92.91,18.79 ; C8.2 92.91,20.95 ; C8.2 93.99,19.87 ; 252.72,129.91 R22.2 ; R22.2 253.5,128.75 ; R22.2 254.27,129.91 ; R22.2 253.5,131.06 ; 165.82,10.58 J3.2 ; J3.2 169.22,10.58 ; J3.2 167.52,8.88 ; J3.2 167.52,12.29 ; 21.42,8.89 J20.4 ; J20.4 22.77,10.24 ; J20.4 21.42,11.6 ; J20.4 20.07,10.24 ; 82.85,92.19 J29.5 ; J29.5 81.72,93.32 ; J29.5 82.85,94.45 ; J29.5 83.98,93.32 ; 49.35,137.49 U2.1 ; U2.1 48.75,137.99 ; U2.1 49.95,137.99 ; J11.4 44.46,11.6 ; J11.4 44.46,8.89 ; J11.4 45.81,10.24 ; J11.4 43.1,10.24 ; 76.78,123.26 C14.2 ; C14.2 76.78,125.22 ; C14.2 77.55,124.24 ; C14.2 76.01,124.24 ; 76.65,119.8 C15.2 ; C15.2 77.31,120.53 ; C15.2 76.65,121.25 ; 237.65,55.52 C13.2 ; C13.2 237.65,56.96 ; C13.2 238.31,56.24 ; 135.83,19.87 C4.2 ; C4.2 136.91,18.79 ; C4.2 137.99,19.87 ; C4.2 136.91,20.95 ; 213.09,8.88 J7.2 ; J7.2 214.79,10.58 ; J7.2 213.09,12.29 ; J7.2 211.39,10.58 ; 48.7,127.09 U2.15 ; U2.15 49.2,126.49 ; U2.15 49.2,127.69 ; 89.87,10.58 J18.2 ; J18.2 91.57,12.29 ; J18.2 91.57,8.88 ; J18.2 93.28,10.58 ; C19.2 77.31,106.76 ; C19.2 76.65,106.04 ; C19.2 76.65,107.49 ; 26.21,137.25 D7.2 ; D7.2 25.5,137.96 ; D7.2 26.21,138.67 ; D7.2 26.92,137.96 ; C9.2 25.81,21.32 ; C9.2 24.73,20.24 ; C9.2 26.89,20.24 ; C9.2 25.81,19.16 ; 221.29,137.06 J32.2 ; J32.2 222.42,138.19 ; J32.2 221.29,139.32 ; J32.2 220.16,138.19 ; 103.97,67.6 J1.22 ; J1.22 105.04,68.67 ; J1.22 105.04,66.53 ; J1.22 106.11,67.6 ; 152.91,18.79 C3.2 ; C3.2 153.99,19.87 ; C3.2 152.91,20.95 ; C3.2 151.83,19.87 ; 243.11,19.74 C11.2 ; C11.2 244.19,20.82 ; C11.2 244.19,18.66 ; C11.2 245.27,19.74 ; R31.1 245.6,29.4 ; R31.1 245.6,27.08 ; R31.1 244.82,28.24 ; R31.1 246.37,28.24 ; J5.3 11,121.09 ; J5.3 11,118.39 ; J5.3 9.65,119.74 ; J5.3 12.35,119.74 ; 207.44,53.03 Q2.2 ; Q2.2 208.64,53.03 ; Q2.2 208.04,52.09 ; Q2.2 208.04,53.96 ; 230.49,138.19 J31.2 ; J31.2 231.62,139.32 ; J31.2 231.62,137.06 ; J31.2 232.75,138.19 ; 9.65,50.62 J13.3 ; J13.3 12.35,50.62 ; J13.3 11,51.97 ; J13.3 11,49.27 ; R21.2 253.5,127.23 ; R21.2 253.5,124.92 ; R21.2 252.72,126.08 ; R21.2 254.27,126.08 ; U3.9 220.25,87.29 ; U3.9 218.74,89.12 ; U3.9 217.23,87.29 ; U3.9 218.74,85.46 ; 48.75,136.89 U2.2 ; U2.2 49.35,137.39 ; U2.2 49.95,136.89 ; C6.2 107.99,19.87 ; C6.2 106.91,18.79 ; C6.2 105.83,19.87 ; C6.2 106.91,20.95 ; C7.2 36.81,21.32 ; C7.2 37.89,20.24 ; C7.2 35.73,20.24 ; C7.2 36.81,19.16 ; 106.76,8.88 J17.2 ; J17.2 105.06,10.58 ; J17.2 106.76,12.29 ; J17.2 108.47,10.58 ; 202.65,109.52 C24.2 ; C24.2 203.31,110.24 ; C24.2 202.65,110.96 ; 243.47,8.88 J22.2 ; J22.2 241.76,10.58 ; J22.2 243.47,12.29 ; J22.2 245.17,10.58 ; 245.6,61.08 R29.1 ; R29.1 245.6,63.4 ; R29.1 244.82,62.24 ; R29.1 246.37,62.24 ; 213.19,19.12 C2.2 ; C2.2 214.27,20.2 ; C2.2 212.11,20.2 ; C2.2 213.19,21.28 ; J21.2 228.28,12.29 ; J21.2 228.28,8.88 ; J21.2 229.98,10.58 ; J21.2 226.58,10.58 ; 47.92,116.42 C22.1 ; C22.1 48.64,115.76 ; C22.1 49.36,116.42 ; D4.2 248.46,33.75 ; D4.2 249.28,32.81 ; D4.2 247.65,32.81 ; D4.2 248.46,31.87 ; C16.2 77.31,117.08 ; C16.2 76.65,116.36 ; C16.2 76.65,117.81 ; U2.55 59.25,137.99 ; U2.55 58.05,137.99 ; U2.55 58.65,137.49 ; C18.2 76.65,110.93 ; C18.2 77.31,110.2 ; C18.2 76.65,109.48
  BOTTOM w0.203: 92.91,18.79 C8.2 ; C8.2 93.99,19.87 ; C8.2 91.83,19.87 ; C8.2 92.91,20.95 ; 213.19,19.12 C2.2 ; C2.2 213.19,21.28 ; C2.2 212.11,20.2 ; C2.2 214.27,20.2 ; C7.2 37.89,20.24 ; C7.2 36.81,19.16 ; C7.2 36.81,21.32 ; C7.2 35.73,20.24 ; 24.73,20.24 C9.2 ; C9.2 25.81,19.16 ; C9.2 25.81,21.32 ; C9.2 26.89,20.24 ; J7.2 213.09,12.29 ; J7.2 214.79,10.58 ; J7.2 211.39,10.58 ; J7.2 213.09,8.88 ; 166.83,19.87 C1.2 ; C1.2 167.91,20.95 ; C1.2 167.91,18.79 ; C1.2 168.99,19.87 ; C5.2 123.99,19.87 ; C5.2 122.91,18.79 ; C5.2 122.91,20.95 ; C5.2 121.83,19.87 ; J1.22 106.11,67.6 ; J1.22 103.97,67.6 ; J1.22 105.04,66.53 ; J1.22 105.04,68.67 ; 121.95,8.88 J15.2 ; J15.2 120.25,10.58 ; J15.2 121.95,12.29 ; J15.2 123.65,10.58 ; C10.2 229.11,20.84 ; C10.2 230.19,19.76 ; C10.2 229.11,18.68 ; C10.2 228.03,19.76 ; J31.2 232.75,138.19 ; J31.2 230.49,138.19 ; J31.2 231.62,137.06 ; J31.2 231.62,139.32 ; 135.83,19.87 C4.2 ; C4.2 137.99,19.87 ; C4.2 136.91,18.79 ; C4.2 136.91,20.95 ; 163.5,81.77 J2.9 ; J2.9 162.43,82.84 ; J2.9 164.57,82.84 ; J2.9 163.5,83.91 ; 43.1,10.24 J11.4 ; J11.4 45.81,10.24 ; J11.4 44.46,8.89 ; J11.4 44.46,11.6 ; J32.2 221.29,139.32 ; J32.2 220.16,138.19 ; J32.2 222.42,138.19 ; J32.2 221.29,137.06 ; 105.83,19.87 C6.2 ; C6.2 106.91,18.79 ; C6.2 107.99,19.87 ; C6.2 106.91,20.95 ; J3.2 169.22,10.58 ; J3.2 165.82,10.58 ; J3.2 167.52,8.88 ; J3.2 167.52,12.29 ; 67.5,8.89 J14.4 ; J14.4 68.85,10.24 ; J14.4 67.5,11.6 ; J14.4 66.14,10.24 ; 105.04,69.07 J1.20 ; J1.20 105.04,71.21 ; J1.20 106.11,70.14 ; J1.20 103.97,70.14 ; J9.2 154.03,10.58 ; J9.2 150.63,10.58 ; J9.2 152.33,8.88 ; J9.2 152.33,12.29 ; J8.3 12.35,96.7 ; J8.3 9.65,96.7 ; J8.3 11,95.35 ; J8.3 11,98.05 ; J20.4 21.42,11.6 ; J20.4 21.42,8.89 ; J20.4 22.77,10.24 ; J20.4 20.07,10.24 ; 11,49.27 J13.3 ; J13.3 12.35,50.62 ; J13.3 11,51.97 ; J13.3 9.65,50.62 ; 69.75,129.33 J24.5 ; J24.5 70.82,130.39 ; J24.5 71.88,129.33 ; J24.5 70.82,128.26 ; 9.65,119.74 J5.3 ; J5.3 11,118.39 ; J5.3 12.35,119.74 ; J5.3 11,121.09 ; 166.04,69.07 J2.20 ; J2.20 166.04,71.21 ; J2.20 164.97,70.14 ; J2.20 167.11,70.14 ; 226.58,10.58 J21.2 ; J21.2 228.28,12.29 ; J21.2 228.28,8.88 ; J21.2 229.98,10.58 ; J1.8 105.04,86.45 ; J1.8 106.11,85.38 ; J1.8 103.97,85.38 ; J1.8 105.04,84.31 ; 9.65,73.66 J10.3 ; J10.3 11,72.31 ; J10.3 12.35,73.66 ; J10.3 11,75.01 ; J17.2 106.76,12.29 ; J17.2 106.76,8.88 ; J17.2 105.06,10.58 ; J17.2 108.47,10.58 ; 89.87,10.58 J18.2 ; J18.2 91.57,12.29 ; J18.2 91.57,8.88 ; J18.2 93.28,10.58 ; J22.2 243.47,12.29 ; J22.2 245.17,10.58 ; J22.2 243.47,8.88 ; J22.2 241.76,10.58 ; 81.72,93.32 J29.5 ; J29.5 82.85,94.45 ; J29.5 82.85,92.19 ; J29.5 83.98,93.32 ; 166.04,53.83 J2.32 ; J2.32 167.11,54.9 ; J2.32 164.97,54.9 ; J2.32 166.04,55.97 ; C3.2 152.91,20.95 ; C3.2 153.99,19.87 ; C3.2 151.83,19.87 ; C3.2 152.91,18.79 ; J30.5 82.7,79.65 ; J30.5 81.57,78.52 ; J30.5 83.83,78.52 ; J30.5 82.7,77.39 ; 11,26.23 J16.3 ; J16.3 12.35,27.58 ; J16.3 9.65,27.58 ; J16.3 11,28.93 ; J12.2 137.14,12.29 ; J12.2 138.84,10.58 ; J12.2 137.14,8.88 ; J12.2 135.44,10.58 ; C11.2 245.27,19.74 ; C11.2 244.19,18.66 ; C11.2 244.19,20.82 ; C11.2 243.11,19.74 ; 101.43,70.14 J1.19 ; J1.19 102.5,69.07 ; J1.19 102.5,71.21 ; J1.19 103.57,70.14 ; 33.62,122.68 J28.8 ; J28.8 32.52,123.78 ; J28.8 33.62,124.88 ; J28.8 34.72,123.78
  vias: v1(4.27,51.96) v1(4.42,43.14) v1(4.39,36.92) v1(4.95,56.2) v1(5.08,121.55) v1(5.08,30.09) v1(5.46,128.08) v1(5.59,18.58) v1(8.41,43.14) v1(9.22,53.18) v1(9.35,61.13) v1(10.24,36.97) v1(11.18,82.82) v1(13.06,132.12) v1(13.56,76.39) v1(13.69,70.88) v1(14.22,123.31) v1(14.68,137.63) v1(15.34,13.98) v1(16.28,128.94) v1(16.33,108.45) v1(16.74,5.63) v1(16.81,102.88) v1(17.14,96.53) v1(17.86,92.29) v1(18.24,120.31) v1(18.52,18.89) v1(18.75,76.34) v1(19.02,51.35) v1(19.08,71.77) v1(19.25,84.6) v1(19.66,59.09) v1(20.12,43.58) v1(20.19,131.33) v1(21.29,137.1) v1(25.17,24.2) v1(26.34,84.83) v1(26.26,25.95) v1(26.59,111.5) v1(26.67,107.1) v1(29.06,132.96) v1(29.64,61.2) v1(31.06,81.57) v1(31.39,88.36) v1(31.52,137.68) v1(31.72,114.44) v1(34.19,24.83) v1(35.23,6.67) v1(35.36,106.69) v1(36.25,113.04) v1(36.35,123.66) v1(37.06,86.55) v1(37.16,62.63) v1(37.36,133.92) v1(37.54,125.97) v1(37.82,138.27) v1(38.66,30.04) v1(38.79,106.19) v1(39.42,90.31) v1(39.6,124.07) v1(39.98,16.45) v1(41.25,125.62) v1(41.88,84.83) v1(42.8,58.74) v1(43.13,112.54) v1(43.26,138.47) v1(46.35,114.29) v1(46.74,124.27) v1(47.07,126.02) v1(50.42,73.78) v1(51.16,46.5) v1(51.49,98.92) v1(51.82,63.29) v1(51.94,69.92) v1(52.73,108.85) v1(53.57,131.89) v1(54.51,76.47) v1(54.58,130.27) v1(56.03,92.9) v1(56.92,98.11) v1(57.45,60.11) v1(59.61,111.67) v1(60.58,125.69) v1(61.09,134.63) v1(61.24,15.53) v1(61.34,25.49) v1(62.74,119.93) v1(65.13,16.37) v1(65.28,124.65) v1(65.89,6.44) v1(66.83,132.96) v1(68.15,129.33) v1(68.48,59.7) v1(68.55,13.88) v1(68.71,75.78) v1(69.09,97.47) v1(69.24,89.07) v1(70.15,51.93) v1(70.38,73.5) v1(70.43,69.94) v1(70.84,44.87) v1(73.91,6.82) v1(77.17,15.94) v1(77.29,135.7) v1(77.29,131.23) v1(77.65,7.56) v1(78.66,104.92) v1(79.1,100.93) v1(82.22,133.34) v1(85.34,74.44) v1(86.33,4.92) v1(86.51,62.75) v1(86.84,15.66) v1(87.68,9.79) v1(88.39,58.64) v1(88.85,30.47) v1(89.64,94.35) v1(90.27,77.79) v1(91.29,89.32) v1(91.69,94.35) v1(93.07,105.17) v1(94.16,53.81) v1(97.97,4.46) v1(100.71,105.22) v1(105.79,14.85) v1(106.12,22.37) v1(107.44,96.71) v1(107.59,57.57) v1(108.53,20.94) v1(108.71,57.22) v1(109.88,67.63) v1(110.36,87.9) v1(110.9,81.29) v1(111.02,72.99) v1(112.22,64) v1(112.65,58.08) v1(113.72,60.87) v1(115.98,71.9) v1(117.98,95.75) v1(119.18,74.69) v1(119.76,51.6) v1(120.22,88.81) v1(120.68,46.62) v1(120.8,58.66) v1(120.88,82.34) v1(121.39,64.58) v1(122.94,27.7) v1(123.22,54.85) v1(123.83,130.24) v1(124.16,14.47) v1(128.5,102.17) v1(129.62,41.31) v1(131.09,48.38) v1(131.11,19.9) v1(131.67,14.57) v1(134.09,98.69) v1(135.36,114.16) v1(135.61,103.21) v1(138.18,14.54) v1(140.84,88.69) v1(142.04,95.75) v1(144.63,115.33) v1(144.75,22.87) v1(145.11,64.58) v1(146.13,66.87) v1(146.41,87.31) v1(147.07,85.31) v1(147.29,18.18) v1(148.06,10.61) v1(148.44,61.66) v1(151.08,47.72) v1(151.76,35.17) v1(152.73,73.52) v1(153.31,82.74) v1(153.42,75.99) v1(158.83,77.61) v1(159.77,45.84) v1(160.12,106.9) v1(160.76,14.09) v1(162,39.23) v1(162.64,9.72) v1(166.27,39.51) v1(169.27,96.23) v1(169.32,84.72) v1(172.72,45.48) v1(173.18,90.59) v1(174.07,31.79) v1(174.37,75.68) v1(174.7,63.46) v1(175.16,78.83) v1(176.02,83.43) v1(177.72,70.3) v1(179.22,36.72) v1(179.48,25.54) v1(180.42,47.06) v1(180.82,126.79) v1(181.99,54.04) v1(183.9,60.11) v1(184.15,128.54) v1(184.35,71.64) v1(186.13,82.97) v1(186.11,37.3) v1(186.33,137.12) v1(186.26,131.82) v1(186.94,118.68) v1(187.05,66.16) v1(187.68,32.3) v1(188.16,24.09) v1(190.22,9.39) v1(192.51,60.21) v1(192.51,50.89) v1(192.61,125.72) v1(192.63,10.61) v1(192.76,135.09) v1(193.62,45.25) v1(194.01,18.71) v1(197.36,106.69) v1(197.46,114.77) v1(197.82,119.27) v1(198.78,102.68) v1(199.8,43.8) v1(200.28,129.91) v1(200.43,13.2) v1(200.56,57.44) v1(202.16,67.12) v1(202.77,99.94) v1(203.02,53.89) v1(203.48,48.53) v1(204.32,34.08) v1(204.55,21.05) v1(206.58,60.95) v1(206.81,107.51) v1(208.51,10.73) v1(209.02,24.27) v1(210.11,17.9) v1(211.1,32.42) v1(211.51,33.87) v1(211.73,60.47) v1(211.84,54.14) v1(212.29,48.73) v1(213.31,24.86) v1(213.74,127.5) v1(214.12,102.15) v1(214.2,75.76) v1(216.2,118.3) v1(217.53,126.51) v1(218.74,31.94) v1(218.92,109.13) v1(219.13,21.35) v1(220.07,72.61) v1(220.22,97.86) v1(223.39,32.88) v1(223.57,135.22) v1(224,11.62) v1(226.67,125.8) v1(227.69,134.91) v1(227.81,115.99) v1(227.81,39.23) v1(229.49,32.68) v1(229.57,130.14) v1(229.84,113.04) v1(232.18,59.5) v1(232.46,125.62) v1(233.93,135.55) v1(235.03,39.16) v1(235.69,130.16) v1(236.3,100.42) v1(237.13,32.93) v1(237.34,131.74) v1(237.49,106.82) v1(237.95,42.23) v1(238.33,39.51) v1(240.31,112.46) v1(241.27,106.47) v1(242.9,117.06) v1(244.5,72.38) v1(245.03,135.8) v1(245.34,96.71) v1(246.05,83.22) v1(246.43,52.77) v1(247.85,106.69) v1(247.9,56.2) v1(248.31,123.61) v1(249.38,41.54) v1(250.27,130.67) v1(250.47,47.03) v1(251.08,108.68) v1(251.94,101.03) v1(252.55,115.86) v1(252.73,36.67) v1(253.72,69.38) v1(253.95,110.96) v1(255.8,105.65) v1(258.24,70.91) v1(258.34,53.94) v1(259.18,18.28) v1(259.28,115.51) v1(259.36,125.29) v1(259.82,131.59) v1(259.77,36.29) v1(259.89,121.93) v1(259.89,62.45) v1(260.38,13.45) v1(260.65,129.99) v1(260.73,45.4) v1(262.79,96.59) v1(262.94,17.01) v1(263.7,101.51) v1(265.23,21.76) v1(266.37,26.25) v1(266.47,36.21) v1(266.73,68.06) v1(266.7,57.47) v1(266.75,63.31) v1(266.95,87.16) v1(267.46,45.84) v1(267.59,91.23) v1(267.59,75.68)
VDD5VIN: length 635.8
  TOP w0.203: v1(200.69,84.49) 202.2,84.49 R26.1 ; v1(215.47,34.58) 226.31,34.58 ; R3.1 231.37,37.96 232,38.6 232,45.96 232.18,46.14 234.47,46.14 U1.8 ; U3.1 216.11,92.67 216.31,92.87 258.87,92.87 R36.1 ; R13.2 48.51,42.48 29.18,23.15 29.18,15.74 26.44,12.99 26.44,10.26 J20.3 26.42,5.83 27.77,4.48 82.27,4.48 82.47,4.69 82.47,10.21 J14.1 ; v1(192.66,67.43) 197.03,63.06 D2.2 197.03,40.27 K2.1 200.25,40.24 200.46,40.04 200.46,23.59 200.25,23.38 197.46,23.38 197.23,23.15 197.23,18.97 R33.1 197.21,18.9 197.21,17.62 197,17.41 182.32,17.41 182.1,17.64 R32.1 182.1,28.87 176,34.96 K1.1 175.92,40.32 D1.2 ; U3.2 v1(211.84,87.92)
  TOP w0.254: U1.8 234.49,46.16 234.49,48.86 233.11,50.24 R6.1 232.65,53.24 232.65,53.24 C12.1 236.35,53.37 C13.1 ; R26.1 R24.1 C29.1 202.22,91.66 C28.1 195.75,95.24 195.5,95.49 195.5,132.99 195.75,133.24 F1.2 ; R5.1 223.39,41.01 R4.1 223.44,40.9 223.44,37.45 226.31,34.58 R3.1 ; U3.1 U3.2
  BOTTOM w0.203: J14.1 82.5,6.57 82.7,6.36 99.85,6.36 100.05,6.57 100.05,23.08 107.24,30.27 170.26,30.27 171.32,31.33 171.32,40.04 171.53,40.24 K1.1 ; v1(215.47,34.58) 215.47,46.11 215.26,46.32 197.2,46.32 197,46.11 K2.1 ; v1(211.84,87.92) 208.79,84.88 201.07,84.88 v1(200.69,84.49) 192.86,84.49 192.66,84.29 v1(192.66,67.43)
485_A: length 128.3
  TOP w0.254: J26.5 259.03,43.73 262.94,43.73 263.19,43.47 263.19,40.15 262.94,39.89 247.19,39.89 242.85,44.24 R8.1 242.4,40.39 D3.2 246.28,36.26 239.67,36.26 238,34.58 R3.2 232.6,34.51 R9.1
  BOTTOM w0.254: J26.5 259.02,43.74 263.25,43.74 ; J27.5 263.25,26.74 263.5,26.99 263.5,43.49 263.25,43.74 ; 263.25,43.74 263.46,43.95 263.46,60.53 263.21,60.78 ; 263.21,60.78 263.44,61.01 263.44,77.55 263.19,77.8 J23.5 ; 263.21,60.78 J25.5
485_B: length 137.7
  TOP w0.254: J23.6 264.19,80.8 264.44,80.55 264.44,63.99 264.19,63.74 ; 264.02,46.76 J26.6 ; 264.02,46.76 264.25,46.76 264.5,46.51 264.5,29.99 264.25,29.74 J27.6 ; 264.02,46.76 264.5,47.24 264.5,63.43 264.19,63.74 ; 264.19,63.74 259.04,63.74 J25.6 ; v1(246.43,30.57) D4.1 246.25,32.63 240.39,32.63 237,29.24 R9.2 235.38,29.22 R12.1 ; R10.1 v1(244.97,48.24)
  BOTTOM w0.254: J26.6 259.01,46.75 262.05,46.75 262.46,47.16 262.46,50.74 262.05,51.14 253.85,51.14 250.94,48.24 v1(244.97,48.24) 244.97,32.03 v1(246.43,30.57)
BL_EX_PIN_1: length 41.9
  TOP w0.203: J28.2 28.54,118.31 28.83,118.02 45.11,118.02 45.31,118.23 45.31,128.64 45.52,128.84 51.97,128.84 52.22,129.1 52.22,131.48 52.02,131.69 50.25,131.69 U2.11
BL_EX_PIN_2: length 35
  TOP w0.203: J28.3 31.08,119.26 31.28,119.05 43.99,119.05 44.2,119.26 44.2,129.5 44.4,129.71 51.28,129.71 51.49,129.91 51.49,130.65 51.28,130.85 50.29,130.85 U2.13
BL_EX_PIN_3: length 25.5
  TOP w0.203: U2.12 49.33,131.31 43.81,131.31 43.61,131.1 43.61,121.5 43.35,121.24 J28.4
BL_EX_PIN_4: length 32.8
  TOP w0.203: U2.6 49.27,133.77 42.21,133.77 41.78,133.34 41.78,129 41.58,128.79 26.37,128.79 26,128.43 J28.5
BL_EX_PIN_5: length 29.6
  TOP w0.203: U2.8 49.33,132.91 42.72,132.91 42.52,132.7 42.52,128.28 42.32,128.08 28.74,128.08 28.54,127.88 J28.6
BL_EX_PIN_6: length 26.1
  TOP w0.203: U2.10 49.35,132.09 43.59,132.09 43.1,131.61 43.1,127.6 42.9,127.4 31.29,127.4 31.08,127.18 J28.7
CON_A_PIN_1: length 116.9
  TOP w0.203: J14.2 76.95,10.24 65.48,21.71 65.48,75.53 79.12,89.17 86.54,89.17 86.74,89.37 86.74,92.8 86.94,93 102.5,93 J1.1
CON_A_PIN_2: length 123.6
  TOP w0.203: J14.3 72.42,10.32 72.42,12.94 64.41,20.94 64.41,75.76 78.59,89.93 85.85,89.93 86.06,90.13 86.06,95.58 86.26,95.78 104.84,95.78 105.04,95.58 J1.2
CON_A_PIN_4: length 248.8
  TOP w0.203: J1.4 116.03,90.46 116.89,89.6 116.89,7.89 117.09,7.69 v1(173.96,7.69)
  BOTTOM w0.203: v1(173.96,7.69) 221.95,7.69 222.15,7.89 222.15,20.33 224.05,22.24 244.37,22.24 246.87,19.74 C11.1
  BOTTOM w0.254: J22.1 248,11.13 C11.1
CON_A_PIN_28: length 55.5
  TOP w0.203: C6.1 110.72,59.9 110.64,59.98 J1.28
  BOTTOM w0.254: J17.1 110.72,11.71 C6.1
CON_A_PIN_32: length 198.8
  TOP w0.203: v1(174.02,6.62) 103.66,6.62 103.45,6.82 103.45,23.76 103.66,23.97 109.1,23.97 109.3,24.17 109.3,54.7 109.1,54.9 J1.32
  BOTTOM w0.203: v1(174.02,6.62) 229.39,6.62 J21.1
  BOTTOM w0.254: J21.1 232.92,11.02 C10.1
CON_A_PIN_34: length 126
  TOP w0.203: J13.1 13.63,37.99 v1(18.39,37.99)
  BOTTOM w0.203: v1(18.39,37.99) 113.2,37.99 113.41,38.19 113.41,52.16 113.2,52.36 J1.34
CON_A_PIN_35: length 45.3
  TOP w0.203: J30.4 80.16,59.66 89.99,49.82 102.5,49.82 J1.35
CON_A_PIN_36: length 134.4
  TOP w0.203: v1(19.33,38.8) 19.35,38.77 19.35,25.93 J16.1
  BOTTOM w0.203: J1.36 111.43,49.82 111.63,49.62 111.63,39 111.43,38.8 v1(19.33,38.8)
CON_A_PIN_37: length 49.7
  TOP w0.203: J30.3 77.62,58.28 88.65,47.26 102.48,47.26 J1.37
CON_A_PIN_38: length 193.5
  TOP w0.203: J1.38 107.06,47.28 107.26,47.08 107.26,26.66 107.06,26.46 102.34,26.46 102.13,26.25 102.13,5.09 102.34,4.89 177.88,4.89 178.08,5.09 178.08,22.77 170.54,30.32 170.54,50.64 176.5,56.61 R1.1
CON_B_PIN_1: length 121.3
  TOP w0.203: C5.1 126.72,29.53 122.38,33.87 122.38,85.76 129.72,93.11 163.39,93.11 J2.1
  BOTTOM w0.254: C5.1 126.72,12.67 127.03,12.36 J15.1
CON_B_PIN_2: length 132.9
  BOTTOM w0.203: C2.1 217,91.37 215.37,93 J2.2
  BOTTOM w0.254: J7.1 217,11.75 C2.1
CON_B_PIN_3: length 261.1
  TOP w0.203: J11.2 54.46,20.87 55.78,22.19 R35.2 58.19,22.27 58.19,42.86 60.55,45.23 60.55,76.11 J29.3 77.8,93.35 77.8,96.08 78,96.28 80.8,96.28 81,96.48 81,126.13 80.8,126.33 64.16,126.33 60.8,129.69 U2.37
  BOTTOM w0.203: J29.3 77.72,93.36 77.72,106.85 79.25,108.37 136.6,108.37 154.51,90.46 J2.3
CON_B_PIN_5: length 285
  TOP w0.203: 56.79,6.67 56.59,6.47 50.24,6.47 49.46,7.25 J11.3 ; 56.79,6.67 56.79,16.43 R34.2 ; 56.79,6.67 57,6.47 62.66,6.47 63.02,6.82 63.02,76.03 J29.4 80.31,95.49 80.51,95.7 81.48,95.7 81.69,95.9 81.69,126.46 81.05,127.09 64.41,127.09 61.01,130.49 58.65,130.49 U2.39
  BOTTOM w0.203: J29.4 80.31,104.65 82.88,107.23 136.14,107.23 155.4,87.97 163.45,87.97 J2.5
CON_B_PIN_6: length 89.4
  TOP w0.203: R6.2 231.29,50.3 231.29,56.43 229.84,57.88 205.03,57.88 174.98,87.92 J2.6
  TOP w0.254: U1.1 229.52,48.42 R6.2
CON_B_PIN_11: length 92.9
  TOP w0.203: C4.1 140.72,79.9 141.12,80.3 J2.11
  BOTTOM w0.254: J12.1 140.72,12.09 C4.1
CON_B_PIN_12: length 184
  TOP w0.203: R15.1 v1(28.45,103.24)
  BOTTOM w0.203: v1(28.45,103.24) 28.45,90.44 46.69,72.2 91.41,72.2 94.01,74.79 94.01,102.35 95.2,103.54 121.56,103.54 149.49,75.62
CON_B_PIN_14: length 51.4
  TOP w0.203: J2.14 183.82,77.76 204.95,56.63 208.63,56.63 R2.1
CON_B_PIN_17: length 68.9
  TOP w0.203: J2.17 157.2,72.68 156.72,72.2 C3.1
  BOTTOM w0.254: C3.1 156.72,11.27 J9.1
CON_B_PIN_18: length 134.7
  BOTTOM w0.203: C8.1 96.72,22.52 105.61,31.41 169.95,31.41 170.56,32.02 170.56,72.3 170.36,72.51 166.21,72.51 J2.18
  BOTTOM w0.254: J18.1 96.65,12.36 96.72,12.43 C8.1
CON_B_PIN_19: length 79.5
  TOP w0.203: C1.1 171.72,21.96 171.52,22.16 158.09,22.16 157.55,22.7 157.55,69.94 157.76,70.14 J2.19
  BOTTOM w0.254: J3.1 171.72,11.46 C1.1
CON_B_PIN_21: length 311.2
  TOP w0.203: J8.4 10.93,101.77 7.2,101.77 ; 7.14,55.62 6.91,55.85 6.91,78.46 7.11,78.66 ; 7.14,55.62 J13.4 ; 7.14,55.62 6.88,55.36 6.88,32.89 7.19,32.58 J16.4 ; J10.4 7.11,78.66 ; 7.11,78.66 6.91,78.86 6.91,101.48 7.2,101.77 ; J5.4 7.2,124.74 7,124.54 7,101.97 7.2,101.77
  BOTTOM w0.203: J2.21 155.81,67.6 121.31,102.1 96.04,102.1 95.17,101.23 95.17,74 91.87,70.7 45.82,70.7 37.9,78.63 11.03,78.63 J10.4
CON_B_PIN_22: length 201.4
  BOTTOM w0.203: J2.22 169.54,67.6 169.75,67.4 169.75,32.83 169.54,32.63 21.05,32.63 J16.2
CON_B_PIN_23: length 196.4
  BOTTOM w0.203: J10.2 11.07,68.59 92.25,68.59 96.93,73.27 96.93,100.42 97.13,100.62 120.75,100.62 156.32,65.06 J2.23
CON_B_PIN_24: length 203.7
  BOTTOM w0.203: J13.2 11.06,45.68 13.79,45.68 14,45.48 14,34.13 14.68,33.44 168.61,33.44 168.81,33.64 168.81,64.86 168.61,65.06 J2.24
CON_B_PIN_25: length 231.6
  BOTTOM w0.203: J2.25 157.13,62.52 119.99,99.66 98.55,99.66 98.35,99.46 98.35,72.96 91.72,66.33 6.65,66.33 6.45,66.54 6.45,91.61 6.65,91.81 10.89,91.81 J8.2
CON_B_PIN_27: length 258.2
  BOTTOM w0.203: J2.27 157.71,59.98 119.18,98.52 100,98.52 99.8,98.31 99.8,71.82 93.7,65.72 5.31,65.72 5.11,65.93 5.11,114.59 5.31,114.8 10.94,114.8 J5.2
CON_B_PIN_29: length 199.2
  BOTTOM w0.203: J10.1 11.04,63.62 17.35,63.62 17.55,63.41 17.55,36.74 17.75,36.54 134.11,36.54 134.32,36.74 134.32,55.81 135.94,57.44 J2.29
CON_B_PIN_31: length 222
  TOP w0.203: v1(16.26,61.05) 16.26,86.55 16.05,86.76 11.06,86.76 J8.1
  BOTTOM w0.203: v1(16.26,61.05) 16.26,35.78 16.46,35.57 135.13,35.57 135.53,35.98 135.53,54.01 136.42,54.9 J2.31
CON_B_PIN_33: length 281.5
  BOTTOM w0.203: J5.1 11,109.74 14.55,109.74 14.76,109.95 14.76,116.78 14.55,116.98 3.81,116.98 3.61,116.78 3.61,59.37 3.81,59.17 14.78,59.17 14.99,58.97 14.99,34.89 15.52,34.36 136.6,34.36 136.8,34.56 136.8,52.16 137.01,52.36 J2.33
CON_B_PIN_34: length 94.7
  TOP w0.203: J2.34 170.51,52.36 181.28,63.13 v1(195.61,63.13) ; v1(203.91,63.13) v1(218.69,63.13) ; v1(224.71,39) 224.66,39.05 R4.2
  TOP w0.254: R4.2 226.11,42.43 229.43,42.43 U1.4
  BOTTOM w0.203: v1(218.69,63.13) 218.69,39.21 218.9,39 v1(224.71,39) ; v1(195.61,63.13) v1(203.91,63.13)
DBG_LED_1: length 20.1
  TOP w0.203: U2.3 49.32,136.06 40.87,136.06 40.18,135.37 40.18,131.28 39.98,131.08 35.33,131.08 34.99,131.42 R16.1
DBG_LED_2: length 29.9
  TOP w0.203: U2.4 49.32,134.46 41.43,134.46 41.22,134.25 41.22,130.24 40.89,129.91 26.44,129.91 26.24,130.11 R17.1
ENCODER_A: length 131.1
  TOP w0.203: U2.26 54.8,108.21 59.44,103.57 59.44,48.15 33,21.71 C7.1
  BOTTOM w0.254: J20.1 33,13.66 C7.1
ENCODER_B: length 144.8
  TOP w0.203: C9.1 22,114.37 25.1,117.46 46.43,117.46 46.63,117.67 46.63,122.26 50,125.63 U2.16
  BOTTOM w0.254: C9.1 22,19.66 J20.2
FGND: length 181.9
  TOP w0.254: FL1.2 220.28,121.84 221.34,122.9 221.34,132.7 221.59,132.96 240.78,132.96 C33.2 241,131.69 240.31,130.99 C32.2 240.31,126.25 240.28,126.22 C31.2 ; C31.2 240.18,122.24 C25.2 228.47,126.42 C26.2 ; C31.2 240.28,115.4 230.17,105.3 230.17,98.92 230.43,98.67 259.75,98.67 260,98.92 J19.2 260.06,105.24 263.75,105.24 264,105.49 264,118.16 263.75,118.41 R19.1 R20.1 R21.1 R22.1 R23.1
  TOP w0.635: D9.1 257.93,103.24 J19.2
NRESET: length 9.5
  TOP w0.254: v1(62.59,130.89) 63.94,130.89 C21.1 ; U2.40 v1(56.14,130.89)
  BOTTOM w0.254: v1(56.14,130.89) v1(62.59,130.89)
RELAY1_1: length 34.1
  BOTTOM w0.254: J4.1 182,16.37 K1.5
RELAY1_2: length 20.1
  BOTTOM w0.254: K1.2 176,17.29 J4.2
RELAY2_1: length 31.7
  BOTTOM w0.254: K2.5 203,10.6 J6.1
RELAY2_2: length 17.7
  BOTTOM w0.254: J6.2 197,11.48 K2.2
SWCLK: length 12.2
  TOP w0.254: J24.2 70.76,136.89 U2.53
SWDIO: length 12.9
  TOP w0.254: J24.3 67.89,134.41 66.21,136.09 U2.51
UC_OSC_IN: length 10.3
  TOP w0.254: C22.2 48.67,117.75 Y1.2 48.69,120.56 48.69,123.33 50.8,125.44 U2.17
UC_OSC_OUT: length 9.4
  TOP w0.254: U2.18 51.6,120.55 Y1.1 51.59,117.74 C23.2
VDC_5V: length 263.9
  TOP w0.203: J31.1 234.21,138.24 242.31,138.24
  TOP w0.254: 242.31,138.24 242.56,137.99 C33.1 242.56,131.69 243.23,131.02 C32.1 243.28,127.85 C31.1
  TOP w0.635: J19.1 258.14,112.24 D8.1 249,115.87 243.28,121.59 C31.1
  BOTTOM w0.203: J19.1 259.33,109.72 78.89,109.72 72.69,103.51 J29.1 72.69,78.67 J30.1
N8883662: length 33.9
  TOP w0.203: Q3.3 43.5,102.24 47.02,105.75 52.74,105.75 LS1.M 53.97,99.96 R14.1 53.98,93.22 D5.1
N8883700: length 16.8
  TOP w0.203: D5.2 51.94,92.49 R14.2 52.66,93.23 R13.1 48.51,101 LS1.P
N9062725: length 4.9
  TOP w0.254: U2.31 57.2,122.39 L1.1
N9076286: length 18.9
  TOP w0.254: L2.2 D9.2 D8.2
N9076290: length 56.6
  TOP w0.254: C26.1 225.35,122.44 C25.1 ; R18.1 203.26,121.84 FL1.1 209.4,115.76 209.83,115.33 218.64,115.33 C25.1 ; C25.1 225.55,122.24 L2.1
N9076304: length 38.7
  TOP w0.254: FL1.4 208.8,133.24 F1.1 203.01,127.48 202.51,126.99 200.71,126.99 200.46,126.74 200.46,121.83 R18.2 200.41,116.05 C27.1 201.35,115.11 C24.1 201.35,105.6 D10.2
N9079599: length 17.3
  TOP w0.254: U3.7 U3.8 223.2,91.04 R25.1 231.51,91.04 231.76,90.79 ; 231.76,90.79 231.76,86.39 FB1.1 ; 231.76,90.79 C30.1
N9079749: length 13.1
  TOP w0.254: R24.2 205.08,86.65 U3.3
N9079753: length 10.4
  TOP w0.254: R25.2 R28.1 228.66,86.71 228.6,86.65 U3.6
N9079813: length 12.8
  TOP w0.254: U3.4 204.39,85.38 R26.2
N9092651: length 49.8
  TOP w0.203: D12.2 191.66,18.96 191.71,19.01 191.71,40.04 191.51,40.24 K1.4 187.96,40.28 Q1.3 187.95,51.03 D1.1
N9092718: length 3.6
  TOP w0.203: Q1.1 188.93,52.99 R1.2
N9093131: length 48.2
  TOP w0.203: D13.2 202.83,18.86 206.25,18.86 206.45,19.06 206.45,39.94 206.65,40.15 208.91,40.15 K2.4 208.99,40.25 Q2.3 208.96,51.03 D2.1
N9093215: length 3.6
  TOP w0.203: Q2.1 209.96,53.04 R2.2
N9096482: length 5.4
  TOP w0.254: U1.2 229.5,44.9 226.69,44.9 225.45,46.14 R7.2
N9096486: length 4.8
  TOP w0.254: U1.3 229.5,43.63 R5.2
N9096991: length 5.4
  TOP w0.254: U1.6 238.96,43.61 R8.2
N9096995: length 8.1
  TOP w0.254: R10.2 239.49,48.35 237.39,48.35 236.96,47.92 236.96,45.3 236.53,44.88 U1.7
N9098499: length 25.1
  TOP w0.254: J23.S2 259.21,83.24 253.5,83.24 252.9,82.64 J23.S1 ; J23.S1 252.84,79.24 R11.2 ; J23.S1 252.9,75.84 253.04,75.7 J23.S3
N9104799: length 25.2
  TOP w0.254: J25.S1 252.9,65.64 253.14,65.88 J25.S2 ; J25.S1 252.86,62.24 R29.2 ; J25.S1 252.9,58.59 253.15,58.34 259.21,58.34 J25.S3
N9105165: length 25.6
  TOP w0.254: J26.S2 259.27,49.14 253.15,49.14 252.9,48.89 J26.S1 ; J26.S1 252.9,41.59 253.15,41.34 259.23,41.34 J26.S3 ; J26.S1 252.88,45.24 R30.2
N9105269: length 25.6
  TOP w0.254: J27.S1 252.9,24.59 253.15,24.34 259.25,24.34 J27.S3 ; J27.S1 R31.2 ; J27.S1 252.9,31.89 253.15,32.14 259.25,32.14 J27.S2
N9107937: length 2.7
  TOP w0.203: R32.2 186.1,18.95 D12.1
N9108044: length 2.7
  TOP w0.203: D13.1 201.24,18.95 R33.2
N90510690: length 4.4
  TOP w0.203: Q3.1 35.97,103.24 R15.2
N90714391: length 2.6
  TOP w0.254: D6.1 35,133.9 R16.2
N90750741: length 2.6
  TOP w0.254: D7.1 R17.2
N90797911: length 2.5
  TOP w0.203: D11.1 260.89,88.93 260.84,88.98 R27.2 260.13,88.98
N91389651: length 2.4
  TOP w0.203: D14.1 262.59,92.75 R36.2

## Copper pours and planes (outline as drawn; the poured copper is in the pictures)
GND on TOP: 8.08,3.08 264.62,3.08 269.7,8.16 269.7,135.16 264.62,140.24 8.08,140.24 3,135.16 3,8.16 ; 8 cut-outs
GND on BOTTOM: 8.08,3.08 264.62,3.08 269.7,8.16 269.7,135.16 264.62,140.24 8.08,140.24 3,135.16 3,8.16

## Text on the board
Ref Des/Silkscreen Top: LED_2 | LED_1 | 3.3V | SWCLK | SWDIO | REZ | GND | 3.3V OK | 5V OK | BL_EX_4 | BL_EX_5 | BL_EX_6 | BL_EX_1 | BL_EX_2 | BL_EX_3 | 5VDC | 3.3VDC | STM_PC3 | STM_PB8 | STM_PC2 | STM_PB9 | 5V | 03/2022 | Meto_Stm_Cry_BL_V0_0 | Made in TURKIYE | ENCODER | EXT_I2C | EXT_RS232 | BUDDY | EMERG. | Z2_LMT | Z1_LMT | Y_LMT | X1_LMT | VACUM_1 | VACUM_2 | X2_LMT | Z1_PRB | Z2_PRB | RS485_S3 | RS485_S4 | RS485_S2 | RS485_S1 | Z2_MOTOR | Y_MOTOR | Z1_MOTOR | X2_MOTOR | X1_MOTOR | 5VDC_IN | + | METOSOFT | -
